# Allegro board BAT_MODULE.brd
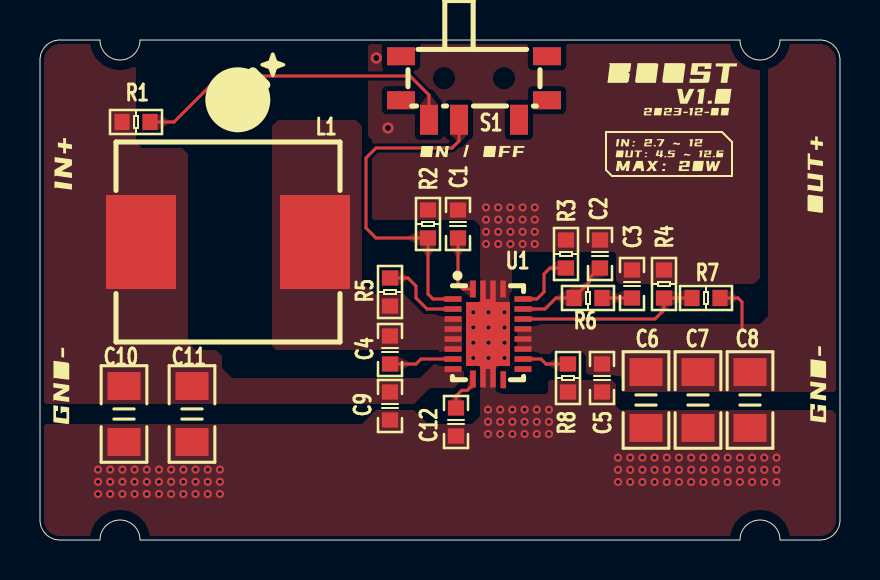
[diagram p0: board, top side]
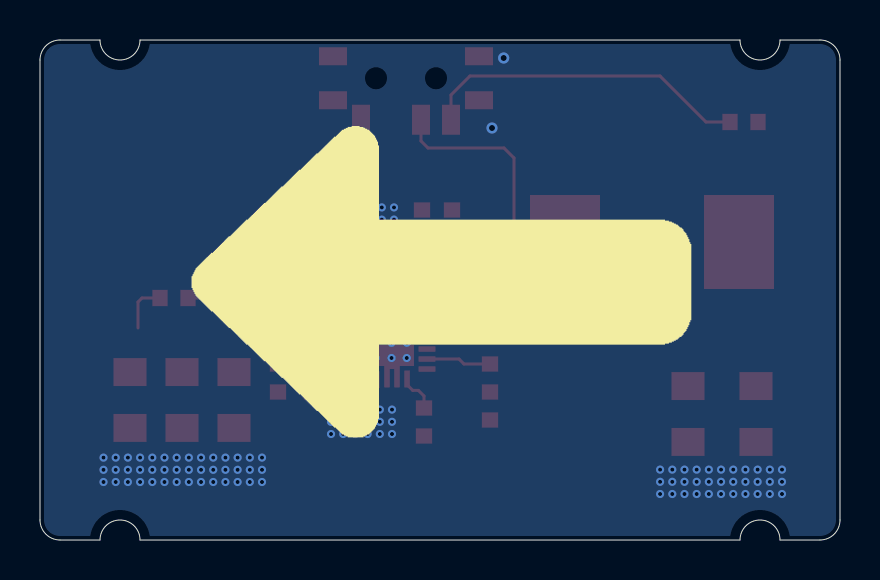
[diagram p1: board, bottom side, seen from below]

Outline 40 x 25 mm; copper layers: TOP, BOTTOM. Coordinates in mm from the lower left corner of the outline.
Outline path: 0,24 arc(0.29,24.71) 1,25 3,25 arc(4,24) 5,25 35,25 arc(36,24) 37,25 39,25 arc(39.71,24.71) 40,24 40,1 arc(39.71,0.29) 39,0 37,0 arc(36,1) 35,0 5,0 arc(4,1) 3,0 1,0 arc(0.29,0.29) 0,1 0,24

## Design rules (mm)
constraint set DEFAULT: min track width 0.152
net group N728315: nets N728315 N728381
net group N729347: nets N729347 N729351

## Placement (name value [footprint] x y rotation side)
C1  0.1uF  [C0603]  20.9 15.8 270 top
C2  47pF  [C0603]  28 14.3 90 top
C3  47nF  [C0603]  29.6 12.8 90 top
C4  0.1uF  [C0603]  17.5 9.5 270 top
C5  1uF  [C0603]  28.1 8.1 90 top
C6  22uF  [C1206]  30.3 7 90 top
C7  22uF  [C1206]  32.9 7 90 top
C8  22uF  [C1206]  35.5 7 90 top
C9  0.1uF  [C0603]  17.5 6.7 90 top
C10  10uF  [C1206]  4.2 6.3 90 top
C11  10uF  [C1206]  7.6 6.3 90 top
C12  47nF  [C0603]  20.8 5.9 270 top
L1  2.2uH  [IND-SMD_11X10_2MM]  9.4 14.9 0 top
NOREF  -  []  -3.53 16.9 0 top
NOREF#2  -  []  10.27 22.39 0 top
NOREF#3  -  []  31.23 18.51 0 top
NOREF#4  -  []  2 0 90 top
NOREF#5  -  []  30.96 19.97 0 top
NOREF#6  -  []  -3.55 18.96 0 top
NOREF#7  -  []  -4.8 14.15 0 top
NOREF#8  -  []  -3.73 20.85 0 top
NOREF#9  -  []  33.34 26.3 0 top
NOREF#10  -  []  39.44 26.42 0 top
NOREF#11  -  []  21.63 19.43 0 top
NOREF#12  -  []  0 23 0 top
NOREF#13  -  []  31.49 19.31 0 top
NOREF#14  -  []  -27.4 6.54 0 top
NOREF#15  -  []  31.71 23.36 0 top
R1  10K  [R0603]  4.8 20.9 180 top
R2  10K  [R0603]  19.4 15.8 270 top
R3  100K  [R0603]  26.3 14.3 270 top
R4  56K  [R0603]  31.2 12.8 270 top
R5  255K  [R0603]  17.5 12.4 90 top
R6  17.4K  [R0603]  27.4 12.1 180 top
R7  502K  [R0603]  33.3 12.1 0 top
R8  10K  [R0603]  26.4 8.1 90 top
S1  SK-3296S-01-L3  [SW_SMD_SK-3296S]  21.7 22.6 180 top
U1  TPS61088RHLR  [VQFN20-4_6X3_6]  22.4 10.3 270 top

## Library data of the parts
C1-C12 = C
L1 = L
R1-R8 = R
S1 = SW_SMD_sk-3296s
U1 = TPS61088RHLT

## Footprints (pads in the part's own frame, mm; a bottom-side part is the same pattern mirrored in y, then rotated)
C0603
  rect 0.762x0.813 smd: 1(-0.7,0) 2(0.7,0)
C1206
  rect 1.397x1.651 smd: 1(-1.397,0) 2(1.397,0)
IND-SMD_11X10_2MM
  rect 3.5x4.7 smd: 1(-4.35,0) 2(4.35,0)
R0603
  rect 0.762x0.813 smd: 1(-0.7,0) 2(0.7,0)
SW_SMD_SK-3296S
  rect 0.9x1.5 smd: 1(-2.25,1.587) 2(0.75,1.587) 3(2.25,1.587)
  rect 1.4x0.9 smd: 4(-3.65,-1.587) 5(3.65,-1.587) 6(-3.65,0.612) 7(3.65,0.612)
VQFN20-4_6X3_6
  rect 0.85x0.28 smd: 1(-2.25,-0.752) 10(2.25,-0.752) 11(2.286,0.762) 20(-2.25,0.75)
  rect 0.28x0.85 smd: 2(-1.748,-1.75) 3(-1.248,-1.75) 4(-0.749,-1.75) 5(-0.248,-1.75) 6(0.252,-1.75) 7(0.752,-1.75) 8(1.252,-1.75) 9(1.752,-1.75) 12(1.752,1.75) 13(1.252,1.75) 14(0.75,1.748) 15(0.25,1.748) 16(-0.25,1.748) 17(-0.75,1.748) 18(-1.25,1.748) 19(-1.75,1.748)
  custom 5.35x2.2 smd: 21(0,0)

## Nets
AGND: C1.1 C2.2 C3.2 C5.1 C6.1 C7.1 C8.1 C9.1 C10.1 C11.1 C12.2 R2.1 R3.1 R4.1 R8.1 U1.20 U1.21
VIN: C9.2 C10.2 C11.2 L1.1 R1.2 U1.9
VOUT: C5.2 C6.2 C7.2 C8.2 R7.2 U1.14 U1.15 U1.16(\VOUT3\)
N728315: R5.2 U1.3
N728330: C4.1 L1.2 R5.1 U1.4 U1.5 U1.6 U1.7
N728381: C4.2 U1.8
N728814: C1.2 U1.1
N729005: R4.2 R7.1 U1.17
N729347: C3.1 R6.1
N729351: C2.1 R6.2 U1.18
N729460: R3.2 U1.19
N729490: C12.1 U1.10
N730115: R2.2 S1.2 U1.2
N730472: R1.1 S1.3
N731506: R8.2 U1.13

Pads without a net: S1 1 4 5 6 7; U1 11 12

## Via types
v1: diameter 0.406, hole 0.203, TOP to BOTTOM, 125 vias
v2: diameter 0.559, hole 0.305, TOP to BOTTOM, 2 vias

## Routing (per net, layer and track width the routed paths; a pad name or vN(x,y) marks a point on that pad's centre or on a via; arc(x,y) is an arc through that point)
AGND:
  vias: v1(2.9,3.52) v1(2.9,2.91) v1(2.9,2.3) v1(3.51,3.52) v1(3.51,2.91) v1(3.51,2.3) v1(4.12,3.52) v1(4.12,2.91) v1(4.12,2.3) v1(4.73,3.52) v1(4.73,2.91) v1(4.73,2.3) v1(5.34,3.52) v1(5.34,2.91) v1(5.34,2.3) v1(5.95,3.52) v1(5.95,2.91) v1(5.95,2.3) v1(6.56,3.52) v1(6.56,2.91) v1(6.56,2.3) v1(7.17,3.52) v1(7.17,2.91) v1(7.17,2.3) v1(7.78,3.52) v1(7.78,2.91) v1(7.78,2.3) v1(8.39,3.52) v1(8.39,2.91) v1(8.39,2.3) v1(9,3.52) v1(9,2.91) v1(9,2.3) v1(21.66,11.39) v1(21.66,10.62) v1(21.66,9.86) v1(21.66,9.1) v1(22.3,16.63) v1(22.3,16.02) v1(22.3,15.41) v1(22.3,14.8) v1(22.42,11.39) v1(22.42,10.62) v1(22.42,9.86) v1(22.42,9.1) v1(22.4,6.52) v1(22.4,5.91) v1(22.4,5.3) v1(22.91,16.63) v1(22.91,16.02) v1(22.91,15.41) v1(22.91,14.8) v1(23.01,6.52) v1(23.01,5.91) v1(23.01,5.3) v1(23.22,11.39) v1(23.22,10.62) v1(23.22,9.86) v1(23.22,9.1) v1(23.52,16.63) v1(23.52,16.02) v1(23.52,15.41) v1(23.52,14.8) v1(23.62,6.52) v1(23.62,5.91) v1(23.62,5.3) v1(24.13,16.63) v1(24.13,16.02) v1(24.13,15.41) v1(24.13,14.8) v1(24.23,6.52) v1(24.23,5.91) v1(24.23,5.3) v1(24.74,16.63) v1(24.74,16.02) v1(24.74,15.41) v1(24.74,14.8) v1(24.84,6.52) v1(24.84,5.91) v1(24.84,5.3) v1(25.45,6.52) v1(25.45,5.91) v1(25.45,5.3) v1(28.9,4.12) v1(28.9,3.51) v1(28.9,2.9) v1(29.51,4.12) v1(29.51,3.51) v1(29.51,2.9) v1(30.12,4.12) v1(30.12,3.51) v1(30.12,2.9) v1(30.73,4.12) v1(30.73,3.51) v1(30.73,2.9) v1(31.34,4.12) v1(31.34,3.51) v1(31.34,2.9) v1(31.95,4.12) v1(31.95,3.51) v1(31.95,2.9) v1(32.56,4.12) v1(32.56,3.51) v1(32.56,2.9) v1(33.17,4.12) v1(33.17,3.51) v1(33.17,2.9) v1(33.78,4.12) v1(33.78,3.51) v1(33.78,2.9) v1(34.39,4.12) v1(34.39,3.51) v1(34.39,2.9) v1(35,4.12) v1(35,3.51) v1(35,2.9) v1(35.61,4.12) v1(35.61,3.51) v1(35.61,2.9) v1(36.22,4.12) v1(36.22,3.51) v1(36.22,2.9) v1(36.82,4.12) v1(36.82,3.51) v1(36.82,2.9) v2(16.82,24.1) v2(17.4,20.6)
VOUT: length 2.5
  TOP w0.152: 35.1,10.6 35.1,11.9 34.9,12.1 R7.2
N728315: length 4.1
  TOP w0.152: R5.2 18.4,13.1 18.8,12.7 18.8,12.1 19.35,11.55 U1.3
N728381: length 3.3
  TOP w0.152: C4.2 18.8,8.8 19.05,9.05 U1.8
N728814: length 3.2
  TOP w0.152: U1.1 21.15,12.55 20.9,12.8 C1.2
N729005: length 9.2
  TOP w0.152: U1.17 30.75,11.05 31.1,11.4 31.1,11.42 31.2,11.52 R4.2 R7.1
N729347: length 1.5
  TOP w0.152: R6.1 C3.1
N729351: length 4.8
  TOP w0.152: U1.18 25.25,11.55 25.8,12.1 R6.2 26.7,12.13 27.45,12.88 27.45,13.08 27.97,13.6 C2.1
N729460: length 3.3
  TOP w0.152: U1.19 24.85,12.05 25.2,12.4 25.2,13.3 25.5,13.6 R3.2
N729490: length 2
  TOP w0.152: U1.10 21.65,7.76 21.36,7.48 21.08,7.48 20.8,7.2 C12.1
N730115: length 17
  TOP w0.152: U1.2 19.65,12.05 19.4,12.3 R2.2 16.8,15.1 16.3,15.6 16.3,19.1 16.8,19.6 20.6,19.6 20.95,19.95 S1.2
N730472: length 16.5
  TOP w0.152: R1.1 6.7,20.9 9,23.2 18.5,23.2 19.45,22.25 S1.3
N731506: length 2.4
  TOP w0.152: R8.2 25.3,8.8 25.05,9.05 U1.13

## Copper pours and planes (outline as drawn; the poured copper is in the pictures)
AGND on TOP: 35.9,24.8 36,24.7 36,13.1 35.7,12.8 29,12.8 28.8,13 28.8,14.3 28.7,14.4 24,14.4 23.6,14 23.6,8.7 23.5,8.6 23,8.6 22.9,8.5 22.9,7.5 23.1,7.3 25.3,7.3 25.4,7.4 25.4,7.9 25.5,8 28.6,8 28.8,7.8 28.8,6.7 29,6.5 39.6,6.5 39.8,6.3 39.8,1 39.57,0.43 39,0.2 1,0.2 0.43,0.43 0.2,1 0.2,5.7 0.3,5.8 16.1,5.8 16.8,6.5 18.7,6.5 19.4,5.8 21.6,5.8 22,6.2 22,8.5 21.9,8.6 21.4,8.6 21.3,8.7 21.3,11.9 21.4,12 21.9,12 22,12.1 22,15.7 21.7,16 16.7,16 16.6,16.1 16.6,20 16.4,20.2 16.4,24.7 16.5,24.8
AGND on BOTTOM: 39.8,1 39.57,0.43 39,0.2 1,0.2 0.43,0.43 0.2,1 0.2,24 0.43,24.57 1,24.8 39,24.8 39.57,24.57 39.8,24
VIN on TOP: 0.58,24.68 0.78,24.77 1,24.8 4.7,24.8 4.8,24.7 4.8,19.9 5.1,19.6 7.1,19.6 7.4,19.3 7.4,9.9 7.8,9.5 8.8,9.5 9.1,9.2 9.1,8.6 9.6,8.1 19,8.1 19.7,8.8 21.1,8.8 21.2,8.7 21.2,8.1 20.7,7.6 19.5,7.6 18.7,6.8 0.3,6.8 0.2,6.9 0.2,24 0.23,24.22 0.32,24.42
VOUT on TOP: 36.5,24.8 39,24.8 39.22,24.77 39.42,24.68 39.68,24.42 39.77,24.22 39.8,24 39.8,7.5 39.7,7.4 29.2,7.4 29.1,7.5 29.1,8.1 29,8.2 27.5,8.2 27.3,8.4 27.3,9.2 27,9.5 25.7,9.5 25.5,9.3 23.7,9.3 23.6,9.4 23.6,10.7 23.7,10.8 36,10.8 36.4,11.2 36.4,24.7
N728330 on TOP: 20.1,9.3 21.1,9.3 21.2,9.4 21.2,11.2 21.1,11.3 19.2,11.3 18.2,12.3 16.7,12.3 16.1,12.9 16.1,20.7 15.8,21 11.9,21 11.6,20.7 11.6,9.7 11.8,9.5 19.9,9.5

Small or netless copper shapes (teardrops, artwork), in the pictures only: 29 on TOP
